# Altium PCB 340-XXXXX-XXX.PcbDoc (part 1 of 2)
Units mil, origin at the board's own origin, x right, y up, seen from the top; angles counter-clockwise.
Board outline 2825 x 4480 mil, 2 copper layers (Top Layer, Bottom Layer), stack 60.8 mil thick; 87 components, 73 nets, 342 pads, 470 vias.
Unrouted connection lines stored in the file: 3.
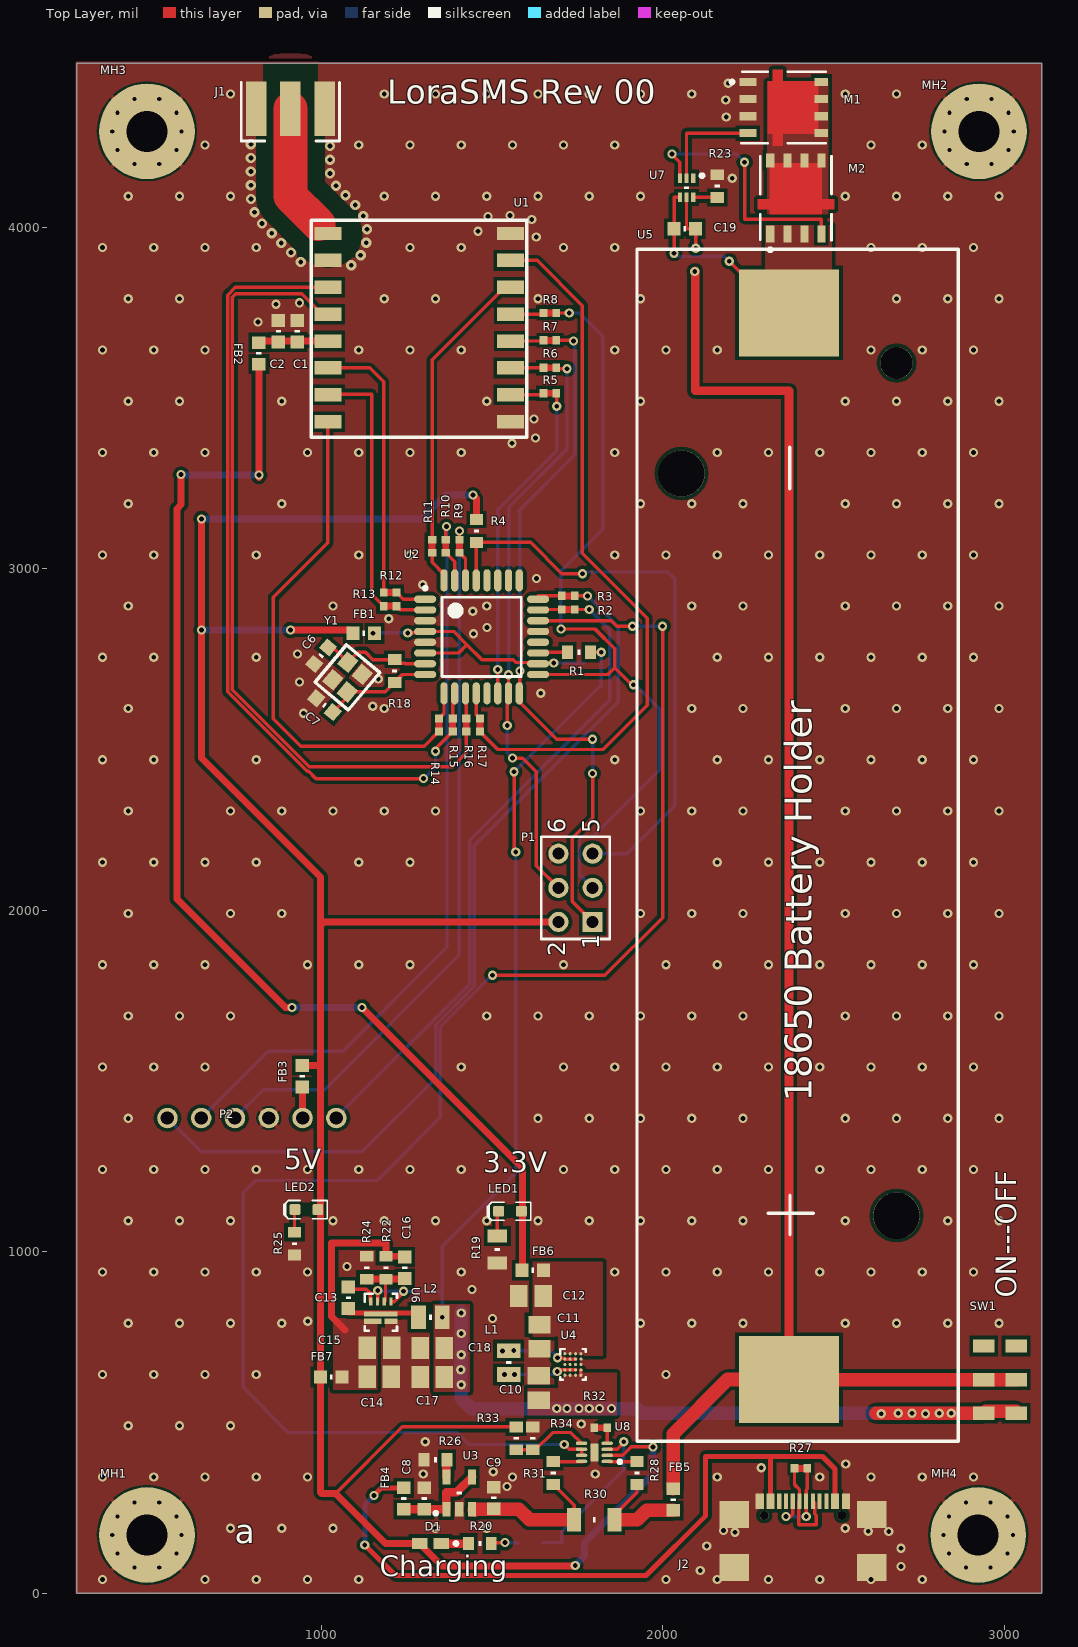
[diagram p0: Top Layer view]
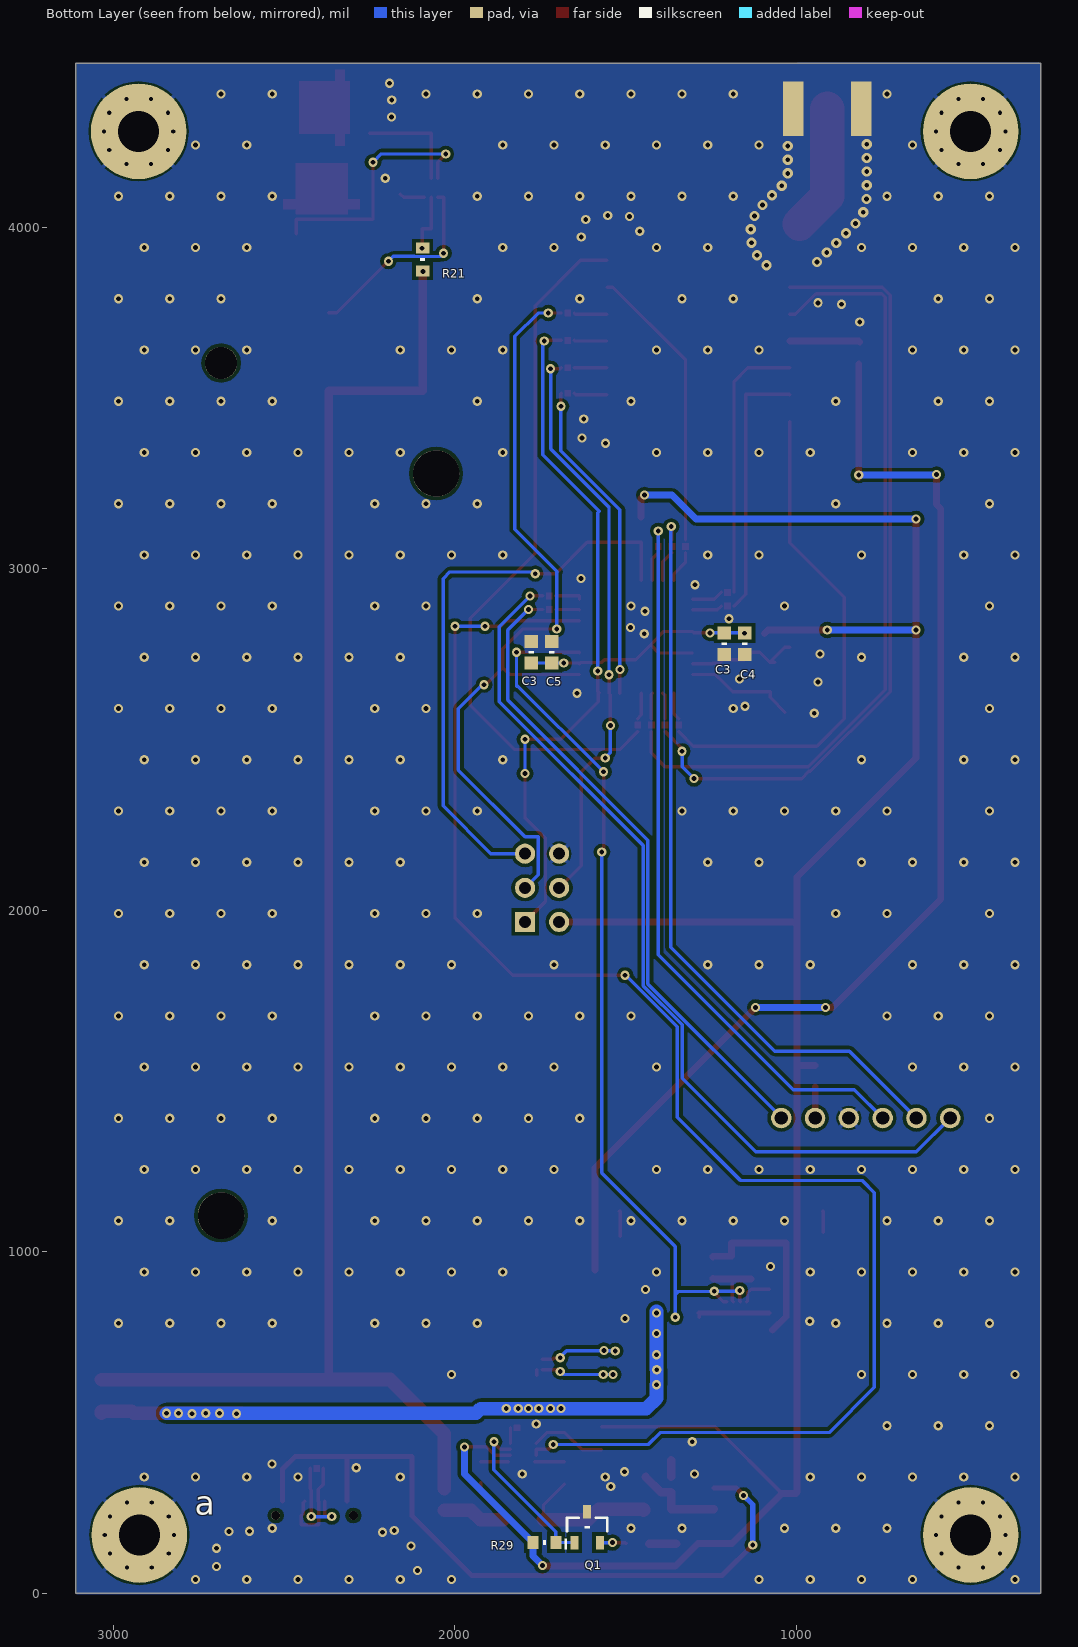
[diagram p1: Bottom Layer view, seen from below]

## Layer stack, top to bottom
Top Solder: solder mask 0.4, Solder Resist, Dk 3.5
Top Layer: signal copper 1.4
Dielectric1: core 58, FR-4, Dk 4.8
Bottom Layer: signal copper 1.4
Bottom Solder: solder mask 0.4, Solder Resist, Dk 3.5

## Board outline
285,0 3110,0 3110,4480 285,4480

## Design rules (kind name [scope] priority, off if disabled: settings)
AcuteAngle [All] p1: minimum=5.50000000000000E+0001 checktracksonly=FALSE
Clearance "50 Ohms" [InNetClass('50 Ohms')] p1: gap=50 ignorepadtopadclearanceinfootprint=FALSE
Clearance LAYER4-GND [InNamedPolygon('LAYER4-GND')] p2: gap=9.84 ignorepadtopadclearanceinfootprint=FALSE except(0: Arc-Hole Track-Hole SMDPad-Hole THPad-Hole Via-Hole Fill-Hole Poly-Hole Region-Hole Text-Hole)
Clearance BOT-GND [InNamedPolygon('BOT-GND')] p3: gap=9.84 ignorepadtopadclearanceinfootprint=FALSE except(0: Arc-Hole Track-Hole SMDPad-Hole THPad-Hole Via-Hole Fill-Hole Poly-Hole Region-Hole Text-Hole)
Clearance LAYER3-GND [InNamedPolygon('LAYER3-GND')] p4: gap=9.84 ignorepadtopadclearanceinfootprint=FALSE except(0: Arc-Hole Track-Hole SMDPad-Hole THPad-Hole Via-Hole Fill-Hole Poly-Hole Region-Hole Text-Hole)
Clearance LAYER1-GND [InNamedPolygon('LAYER1-GND')] p5: gap=9.84 ignorepadtopadclearanceinfootprint=FALSE except(0: Arc-Hole Track-Hole SMDPad-Hole THPad-Hole Via-Hole Fill-Hole Poly-Hole Region-Hole Text-Hole)
Clearance TOP-GND [InNamedPolygon('TOP-GND')] p6: gap=9.84 ignorepadtopadclearanceinfootprint=FALSE except(0: Arc-Hole Track-Hole SMDPad-Hole THPad-Hole Via-Hole Fill-Hole Poly-Hole Region-Hole Text-Hole)
Clearance LAYER2-GND [InNamedPolygon('LAYER2-GND')] p7: gap=9.84 ignorepadtopadclearanceinfootprint=FALSE except(0: Arc-Hole Track-Hole SMDPad-Hole THPad-Hole Via-Hole Fill-Hole Poly-Hole Region-Hole Text-Hole)
Clearance Clearance_DIFF [(InDifferentialPairClass('All Differential Pairs')) vs (InDifferentialPairClass('All Differential Pairs'))] p8: gap=3.94 ignorepadtopadclearanceinfootprint=FALSE except(0: Arc-Hole Track-Hole SMDPad-Hole THPad-Hole Via-Hole Fill-Hole Poly-Hole Region-Hole Text-Hole; 4.25: Arc-Via Track-Via; 4.96: SMDPad-Via; 5: Via-Via Via-Fill Via-Poly Via-Region Via-Text; 6.89: THPad-Via)
Clearance [All] p9: gap=10 ignorepadtopadclearanceinfootprint=FALSE except(0: Arc-Hole Track-Hole SMDPad-Hole THPad-Hole Via-Hole Fill-Hole Poly-Hole Region-Hole Text-Hole; 3.94: Arc-Arc Arc-Track Arc-SMDPad Arc-THPad Arc-Via Arc-Text Track-Track Track-SMDPad Track-THPad Track-Via Track-Text SMDPad-SMDPad SMDPad-THPad SMDPad-Via SMDPad-Text THPad-THPad THPad-Text Fill-Text Poly-Text Region-Text Text-Text; 5: Via-Via Via-Text; 6.89: THPad-Via)
ComponentClearance [All] p1 off: gap=10 collisioncheckmode=3 verticalgap=10 showdistances=FALSE
ComponentClearance ComponentClearance_Place [All] p2 off: gap=0 collisioncheckmode=3 verticalgap=10 showdistances=FALSE
ComponentClearance ComponentClearance_JTAG [HasFootprint('TP-600') vs HasFootprint('TP-600')] p3 off: gap=600.39 collisioncheckmode=3 verticalgap=9.84 showdistances=FALSE
ComponentClearance ComponentClearance_TP [InComponent('TP57') Or InComponent('TP60') vs InComponent('TP58') or InComponent('tp61')] p4 off: gap=0 collisioncheckmode=3 verticalgap=9.84 showdistances=FALSE
ComponentClearance ComponentClearance_SHORT [HasFootprint('SHORT-CIRCUIT') vs HasFootprint('SHORT-CIRCUIT')] p5 off: gap=0 collisioncheckmode=3 verticalgap=9.84 showdistances=FALSE
ComponentClearance ComponentClearance_TIEBAR [HasFootprint('TIEBAR-3N') vs HasFootprint('TIEBAR-3N')] p6 off: gap=0 collisioncheckmode=3 verticalgap=9.84 showdistances=FALSE
DiffPairsRouting Diff_90Ohm_USB [InDifferentialPairClass('Diff_USB')] p1: maxlimit=5.5 minlimit=5.5 mostfreqgap=5.5 toplayer_minwidth=9 toplayer_maxwidth=9 toplayer_prefwidth=9 bottomlayer_minwidth=9 bottomlayer_maxwidth=9 bottomlayer_prefwidth=9 maxuncoupledlength=150
DiffPairsRouting Diff_90Ohm_RF [InDifferentialPairClass('Diff_RF')] p2: maxlimit=5.5 minlimit=5.5 mostfreqgap=5.5 toplayer_minwidth=9 toplayer_maxwidth=9 toplayer_prefwidth=9 bottomlayer_minwidth=9 bottomlayer_maxwidth=9 bottomlayer_prefwidth=9 maxuncoupledlength=255
DiffPairsRouting Diff_100Ohm [InDifferentialPairClass('Diff_Ethernet')] p3: maxlimit=7 minlimit=7 mostfreqgap=7 toplayer_minwidth=8 toplayer_maxwidth=8 toplayer_prefwidth=8 bottomlayer_minwidth=8 bottomlayer_maxwidth=8 bottomlayer_prefwidth=8 maxuncoupledlength=400
DiffPairsRouting [(InDifferentialPairClass('All Differential Pairs'))] p4: maxlimit=74.8 minlimit=3.94 mostfreqgap=9.84 toplayer_minwidth=3.94 toplayer_maxwidth=15 toplayer_prefwidth=15 bottomlayer_minwidth=3.94 bottomlayer_maxwidth=15 bottomlayer_prefwidth=15 maxuncoupledlength=400
Height [All] p1 off: minheight=0 maxheight=984.25 prefheight=492.13
HoleSize [All] p1: absolutevalues=TRUE maxlimit=492.13 minlimit=7.87 maxpercent=80.000 minpercent=20.000
HoleToHoleClearance HoleToHoleClearance_TIEBAR [HasFootprint('TIEBAR-3N') vs HasFootprint('TIEBAR-3N')] p1: gap=0 allowstackedmicrovias=TRUE
HoleToHoleClearance [All] p2: gap=9.84 allowstackedmicrovias=TRUE
MatchedLengths MatchedLengths_DDS-DATA [InNetClass('DSS_DATA')] p1: tolerance=250 checknetsindiffpair=TRUE checkdiffpairvsdiffpair=FALSE checkxsignals=FALSE checkothers=FALSE
MatchedLengths MatchedLengths_FPGA_D [InNetClass('FPGA_D[15..0]')] p2: tolerance=1500 checknetsindiffpair=TRUE checkdiffpairvsdiffpair=FALSE checkxsignals=FALSE checkothers=FALSE
MatchedLengths MatchedLengths_FPGA_A [InNetClass('FPGA_A[10..1]')] p3: tolerance=1500 checknetsindiffpair=TRUE checkdiffpairvsdiffpair=FALSE checkxsignals=FALSE checkothers=FALSE
MatchedLengths MatchedLengths_SDRC_A1/2 [(InNetClass('SDRC_A1') OR InNetClass('SDRC_A2'))] p4: tolerance=25 checknetsindiffpair=TRUE checkdiffpairvsdiffpair=FALSE checkxsignals=FALSE checkothers=FALSE
MatchedLengths MatchedLengths_SDRC_A2 [InNetClass('SDRC_A2')] p5: tolerance=25 checknetsindiffpair=TRUE checkdiffpairvsdiffpair=FALSE checkxsignals=FALSE checkothers=FALSE
MatchedLengths MatchedLengths_SDRC_A1 [InNetClass('SDRC_A1')] p6: tolerance=25 checknetsindiffpair=TRUE checkdiffpairvsdiffpair=FALSE checkxsignals=FALSE checkothers=FALSE
MatchedLengths MatchedLengths_SDRC_D [InNetClass('SDRC_D')] p7: tolerance=25 checknetsindiffpair=TRUE checkdiffpairvsdiffpair=FALSE checkxsignals=FALSE checkothers=FALSE
MatchedLengths MatchedLengths_SDRC_A [InNetClass('SDRC_A')] p8: tolerance=25 checknetsindiffpair=TRUE checkdiffpairvsdiffpair=FALSE checkxsignals=FALSE checkothers=FALSE
MinimumAnnularRing MinimumAnnularRing_203 [(AsMM(HoleDiameter) = 0.203)] p1: minimumring=4.92
MinimumAnnularRing MinimumAnnularRing_381 [((ObjectKind = 'Via') And (AsMM(HoleDiameter) = 0.381))] p2: minimumring=4.92
MinimumAnnularRing [All] p3: minimumring=6
MinimumSolderMaskSliver "USB-C SM Clearence" [InComponent('J2')] p1: minsoldermaskwidth=3.94
MinimumSolderMaskSliver [All] p2: minsoldermaskwidth=4.53
PlaneClearance [All] p1: clearance=10
PlaneConnect [All] p1: planeconnectstyle=Relief reliefexpansion=5 reliefentries=4 reliefconductorwidth=12 reliefairgap=6
PolygonConnect [All] p1: thpad.connectstyle=Relief thpad.reliefconductorwidth=12 thpad.reliefentries=4 thpad.polygonreliefangle="45 Angle" thpad.airgapwidth=6 smdpad.connectstyle=Direct smdpad.reliefconductorwidth=12 smdpad.reliefentries=4 smdpad.polygonreliefangle="90 Angle" smdpad.airgapwidth=6 via.connectstyle=Direct via.reliefconductorwidth=6 via.reliefentries=4 via.polygonreliefangle="45 Angle" via.airgapwidth=4
RoutingCorners [All] p1: cornerstyle=45-Degree minsetback=50 maxsetback=100
RoutingPriority [(InDifferentialPairClass('All Differential Pairs'))] p1: routingpriority=1
RoutingTopology RoutingTopology_BOT [OnLayer('Bottom Layer')] p1: topology=Shortest
RoutingTopology RoutingTopology_LR4 [OnLayer('MidLayer4')] p2: topology=Vertical
RoutingTopology RoutingTopology_LR3 [OnLayer('MidLayer3')] p3: topology=Horizontal
RoutingTopology RoutingTopology_LR2 [OnLayer('MidLayer2')] p4: topology=Vertical
RoutingTopology RoutingTopology_LR1 [OnLayer('MidLayer1')] p5: topology=Horizontal
RoutingTopology RoutingTopology_TOP [OnLayer('Top Layer')] p6: topology=Shortest
RoutingTopology [All] p7: topology=Shortest
RoutingVias [All] p1: holewidth=8 width=18 viastyle="Through Hole" minholewidth=8 minwidth=18 maxholewidth=125 maxwidth=340
ShortCircuit ShortCircuit_SHORTS [(InNet('GND') OR InNet('SGND1') OR InNet('SGND2') OR InNet('SGND3') OR InNet('SGND4')and InPADClass(SHORTS)) vs (InNet('GND') OR InNet('SGND1') OR InNet('SGND2') OR InNet('SGND3') OR InNet('SGND4')AND InPADClass(SHORTS))] p1: allowed=TRUE
ShortCircuit ShortCircuit_TIEBAR-PP [InPadClass('TIE BAR') vs InPadClass('TIE BAR')] p2: allowed=TRUE
ShortCircuit ShortCircuit_TIEBAR-TP [InNetClass('SDRC_A1')OR InNetClass('SDRC_A2')OR InNetClass('SDRC_A') vs InPadClass('TIE BAR')] p3: allowed=TRUE
ShortCircuit ShortCircuit_A14 [(InNet('SDRC_A14') OR InNet('SDRC_A14-1') OR InNet('SDRC_A14-2')) vs (InNet('SDRC_A14') OR InNet('SDRC_A14-1') OR InNet('SDRC_A14-2'))] p4: allowed=TRUE
ShortCircuit ShortCircuit_A13 [(InNet('SDRC_A13') OR InNet('SDRC_A13-1') OR InNet('SDRC_A13-2')) vs (InNet('SDRC_A13') OR InNet('SDRC_A13-1') OR InNet('SDRC_A13-2'))] p5: allowed=TRUE
ShortCircuit ShortCircuit_A12 [(InNet('SDRC_A12') OR InNet('SDRC_A12-1') OR InNet('SDRC_A12-2')) vs (InNet('SDRC_A12') OR InNet('SDRC_A12-1') OR InNet('SDRC_A12-2'))] p6: allowed=TRUE
ShortCircuit ShortCircuit_A11 [(InNet('SDRC_A11') OR InNet('SDRC_A11-1') OR InNet('SDRC_A11-2')) vs (InNet('SDRC_A11') OR InNet('SDRC_A11-1') OR InNet('SDRC_A11-2'))] p7: allowed=TRUE
ShortCircuit ShortCircuit_A10 [(InNet('SDRC_A10') OR InNet('SDRC_A10-1') OR InNet('SDRC_A10-2')) vs (InNet('SDRC_A10') OR InNet('SDRC_A10-1') OR InNet('SDRC_A10-2'))] p8: allowed=TRUE
ShortCircuit ShortCircuit_A9 [(InNet('SDRC_A9') OR InNet('SDRC_A9-1') OR InNet('SDRC_A9-2')) vs (InNet('SDRC_A9') OR InNet('SDRC_A9-1') OR InNet('SDRC_A9-2'))] p9: allowed=TRUE
ShortCircuit ShortCircuit_A8 [(InNet('SDRC_A8') OR InNet('SDRC_A8-1') OR InNet('SDRC_A8-2')) vs (InNet('SDRC_A8') OR InNet('SDRC_A8-1') OR InNet('SDRC_A8-2'))] p10: allowed=TRUE
ShortCircuit ShortCircuit_A7 [(InNet('SDRC_A7') OR InNet('SDRC_A7-1') OR InNet('SDRC_A7-2')) vs (InNet('SDRC_A7') OR InNet('SDRC_A7-1') OR InNet('SDRC_A7-2'))] p11: allowed=TRUE
ShortCircuit ShortCircuit_A6 [(InNet('SDRC_A6') OR InNet('SDRC_A6-1') OR InNet('SDRC_A6-2')) vs (InNet('SDRC_A6') OR InNet('SDRC_A6-1') OR InNet('SDRC_A6-2'))] p12: allowed=TRUE
ShortCircuit ShortCircuit_A5 [(InNet('SDRC_A5') OR InNet('SDRC_A5-1') OR InNet('SDRC_A5-2')) vs (InNet('SDRC_A5') OR InNet('SDRC_A5-1') OR InNet('SDRC_A5-2'))] p13: allowed=TRUE
ShortCircuit ShortCircuit_A4 [(InNet('SDRC_A4') OR InNet('SDRC_A4-1') OR InNet('SDRC_A4-2')) vs (InNet('SDRC_A4') OR InNet('SDRC_A4-1') OR InNet('SDRC_A4-2'))] p14: allowed=TRUE
ShortCircuit ShortCircuit_A3 [(InNet('SDRC_A3') OR InNet('SDRC_A3-1') OR InNet('SDRC_A3-2')) vs (InNet('SDRC_A3') OR InNet('SDRC_A3-1') OR InNet('SDRC_A3-2'))] p15: allowed=TRUE
ShortCircuit ShortCircuit_A2 [(InNet('SDRC_A2') OR InNet('SDRC_A2-1') OR InNet('SDRC_A2-2')) vs (InNet('SDRC_A2') OR InNet('SDRC_A2-1') OR InNet('SDRC_A2-2'))] p16: allowed=TRUE
ShortCircuit ShortCircuit_A1 [(InNet('SDRC_A1') OR InNet('SDRC_A1-1') OR InNet('SDRC_A1-2')) vs (InNet('SDRC_A1') OR InNet('SDRC_A1-1') OR InNet('SDRC_A1-2'))] p17: allowed=TRUE
ShortCircuit ShortCircuit_A0 [(InNet('SDRC_A0') OR InNet('SDRC_A0-1') OR InNet('SDRC_A0-2')) vs (InNet('SDRC_A0') OR InNet('SDRC_A0-1') OR InNet('SDRC_A0-2'))] p18: allowed=TRUE
ShortCircuit ShortCircuit_BA0 [(InNet('SDRC_BA0') OR InNet('SDRC_BA0-1') OR InNet('SDRC_BA0-2')) vs (InNet('SDRC_BA0') OR InNet('SDRC_BA0-1') OR InNet('SDRC_BA0-2'))] p19: allowed=TRUE
ShortCircuit ShortCircuit_BA1 [(InNet('SDRC_BA1') OR InNet('SDRC_BA1-1') OR InNet('SDRC_BA1-2')) vs (InNet('SDRC_BA1') OR InNet('SDRC_BA1-1') OR InNet('SDRC_BA1-2'))] p20: allowed=TRUE
ShortCircuit ShortCircuit_BA2 [(InNet('SDRC_BA2') OR InNet('SDRC_BA2-1') OR InNet('SDRC_BA2-2')) vs (InNet('SDRC_BA2') OR InNet('SDRC_BA2-1') OR InNet('SDRC_BA2-2'))] p21: allowed=TRUE
ShortCircuit ShortCircuit_CLK_P [(InNet('SDRC_CLK_P') OR InNet('SDRC_CLK-1_P') OR InNet('SDRC_CLK-2_P')) vs (InNet('SDRC_CLK_P') OR InNet('SDRC_CLK-1_P') OR InNet('SDRC_CLK-2_P'))] p22: allowed=TRUE
ShortCircuit ShortCircuit_CLK_N [(InNet('SDRC_CLK_N') OR InNet('SDRC_CLK-1_N') OR InNet('SDRC_CLK-2_N')) vs (InNet('SDRC_CLK_N') OR InNet('SDRC_CLK-1_N') OR InNet('SDRC_CLK-2_N'))] p23: allowed=TRUE
ShortCircuit ShortCircuit_CLKE0 [(InNet('SDRC_CKE0') OR InNet('SDRC_CKE0-1') OR InNet('SDRC_CKE0-2')) vs (InNet('SDRC_CKE0') OR InNet('SDRC_CKE0-1') OR InNet('SDRC_CKE0-2'))] p24: allowed=TRUE
ShortCircuit ShortCircuit_NCS0 [(InNet('SDRC_NCS0') OR InNet('SDRC_NCS0-1') OR InNet('SDRC_NCS0-2')) vs (InNet('SDRC_NCS0') OR InNet('SDRC_NCS0-1') OR InNet('SDRC_NCS0-2'))] p25: allowed=TRUE
ShortCircuit ShortCircuit_NRAS [(InNet('SDRC_NRAS') OR InNet('SDRC_NRAS-1') OR InNet('SDRC_NRAS-2')) vs (InNet('SDRC_NRAS') OR InNet('SDRC_NRAS-1') OR InNet('SDRC_NRAS-2'))] p26: allowed=TRUE
ShortCircuit ShortCircuit_NCAS [(InNet('SDRC_NCAS') OR InNet('SDRC_NCAS-1') OR InNet('SDRC_NCAS-2')) vs (InNet('SDRC_NCAS') OR InNet('SDRC_NCAS-1') OR InNet('SDRC_NCAS-2'))] p27: allowed=TRUE
ShortCircuit ShortCircuit_NWE [(InNet('SDRC_NWE') OR InNet('SDRC_NWE-1') OR InNet('SDRC_NWE-2')) vs (InNet('SDRC_NWE') OR InNet('SDRC_NWE-1') OR InNet('SDRC_NWE-2'))] p28: allowed=TRUE
ShortCircuit [All] p29: allowed=FALSE
SilkToSilkClearance [All] p1: silktosilkclearance=0
SilkToSolderMaskClearance SilkscreenOverComponentPads [IsPad] p1: minsilkscreentomaskgap=1.5 clearancetoexposedcopper=FALSE
SolderMaskExpansion SolderMaskExpansion_VIA [IsVia] p1: expansion=-1.97
SolderMaskExpansion [IsPad] p2: expansion=1.57
SolderMaskExpansion SolderMaskExpansion_1 [All] p3: expansion=1.57
ViasUnderSMD [All] p1 off: allowed=FALSE
Width [All] p1: maxlimit=120 minlimit=3.94 preferedwidth=8 minimp=50.000000 maximp=50.000000 favimp=50.000000
16 further rules are at their usual default settings.

## Classes and differential pairs
net class "50 Ohms": NetJ1_1

## Components (designator, comment, footprint, x,y, rotation, side; value= is the part's Value field where it differs from the comment)
C1 "0.1µF" CAPC1608X95N 930,3695 r90 top
C2 "1.0µF" CAPC1608X95N 875,3695 r90 top
C3 "1.0µF" CAPC1608X95N 1777,2755 r90 bottom
C3 "0.1µF" CAPC1608X95N 1211,2780 r270 bottom
C4 "0.1µF" CAPC1608X95N 1151,2780 r270 bottom
C5 "0.1µF" CAPC1608X95N 1717,2755 r90 bottom
C6 "27pF" CAPC1608X95N 1000,2745 r50 top
C7 "27pF" CAPC1608X95N 1010,2600 r320 top
C8 "1.0µF" CAPC1608X95N 1301.77,276.61 r90 top
C9 "1.0µF" CAPC1608X95N 1506.02,278.62 r90 top
C10 "10µF" CAPC2013X140N 1637,600.57 r90 top
C11 "10µF" CAPC2013X140N 1639,750.43 r270 top
C12 "47µF" CAPC2013X140N 1614.57,870 r180 top
C13 "10nF" CAPC1608X95N 1080,865 r270 top
C14 "22µF" CAPC2013X140N 1170.47,633.15 r0 top
C15 "22µF" CAPC2013X140N 1170.91,718.15 r0 top
C16 "10pF" CAPC1608X95N 1245,952.68 r270 top
C17 "10µF" CAPC2013X140N 1325,632.68 r180 top
C18 "10µF" CAPC2013X140N 1325,717.68 r180 top
C19 "0.1µF" CAPC1608X95N 2065,3995 r180 top
D1 "APT1608SRCPRV" LEDM1608X90N 1320,145 r180 top
FB1 "BLM18PG121SN1D" INDC1608X95N 1125,2810 r0 top
FB2 "BLM18PG121SN1D" INDC1608X95N 817.72,3630 r270 top
FB3 "BLM18PG121SN1D" INDC1608X95N 945,1513 r270 top
FB4 "BLM18PG121SN1D" INDC1608X95N 1241.77,276.61 r90 top
FB5 "BLM18PG121SN1D" INDC1608X95N 2031.02,273.62 r90 top
FB6 "BLM18PG121SN1D" INDC1608X95N 1620,945 r180 top
FB7 "BLM18PG121SN1D" INDC1608X95N 1030,632.68 r180 top
J1 "CONSMA003.062" LINX_CONSMA003.062 910,4435 r0 top
J2 "USB-C USB 2.0" GCT_USB4110-GF-A 2284.45,269.32 r0 top
L1 "1uH" INDC2016X10N 1549,675 r90 top
L2 "1uH" INDC2016X10N 1320,807.68 r180 top
LED1 "Green" LED-0603-GREEN 1553,1118 r180 top
LED2 "Green" LED-0603-GREEN 957,1123 r180 top
M1 "BSS138" VISHAY_POWERPAK-SO-8-SINGLE 2355,4350 r0 top
M2 "BSS138" VISHAY_POWERPAK-SO-8-SINGLE 2390,4085 r90 top
MH1 "MOUNTING HOLE" MHOLE-120-280 490,170 r0 top
MH2 "MOUNTING HOLE" MHOLE-120-280 2926.56,4280 r0 top
MH3 "MOUNTING HOLE" MHOLE-120-280 490,4280 r0 top
MH4 "MOUNTING HOLE" MHOLE-120-280 2924.06,170 r0 top
P1 "Header 3X2" HDR2X3 1795,1965 r90 top
P2 "BT_Header" BT_MODULE 1044.49,1391 r180 top
Q1 "MMBT3906" SOT95P240X115-3N 1613,193 r90 bottom
R1 "100K" RESC1608X84N 1755.28,2755 r180 top
R2 "0" RESC1005X40N_SHORT 1723.9,2880 r180 top net-tie
R3 "0" RESC1005X40N_SHORT 1723.9,2920 r180 top net-tie
R4 "10K" RESC1608X84N 1455,3110 r270 top
R5 "0" RESC1005X40N_SHORT 1670,3513.19 r180 top net-tie
R6 "0" RESC1005X40N_SHORT 1670,3588.19 r180 top net-tie
R7 "0" RESC1005X40N_SHORT 1670,3668.19 r180 top net-tie
R8 "0" RESC1005X40N_SHORT 1670,3748.19 r180 top net-tie
R9 "0" RESC1005X40N_SHORT 1405,3065 r270 top net-tie
R10 "0" RESC1005X40N_SHORT 1365,3065 r270 top net-tie
R11 "0" RESC1005X40N_SHORT 1325,3065 r270 top net-tie
R12 "0" RESC1005X40N_SHORT 1201.81,2930 r0 top net-tie
R13 "0" RESC1005X40N_SHORT 1201.81,2890 r0 top net-tie
R14 "0" RESC1005X40N_SHORT 1345,2541.81 r90 top net-tie
R15 "0" RESC1005X40N_SHORT 1385,2541.81 r90 top net-tie
R16 "0" RESC1005X40N_SHORT 1425,2541.81 r90 top net-tie
R17 "0" RESC1005X40N_SHORT 1465,2541.81 r90 top net-tie
R18 "1.0MEG" RESC1608X84N 1215,2700 r270 top
R19 "330" RESC2013X84N 1516,1006 r270 top
R20 "510" RESC1608X84N 1465,145 r0 top
R21 "330" RESC1608X84N 2095,3905 r90 bottom
R22 "316K" RESC1608X84N 1190,952.68 r270 top
R23 "2.2K" RESC1608X84N 2160,4120 r90 top
R24 "100K" RESC1608X84N 1133.19,952.68 r90 top
R25 "510" RESC1608X84N 922,1023 r270 top
R26 "2.00K" RESC1608X84N 1335,390 r180 top
R27 "0" RESC1005X40N_SHORT 2405,365 r180 top net-tie
R28 "5.1" RESC1608X84N 1925,351.54 r90 top
R29 "10K" RESC1608X84N 1738,148 r180 bottom
R30 "50m" RESC3216X84N 1800,215 r180 top
R31 "5.1" RESC1608X84N 1680,351.54 r90 top
R32 "0" RESC1005X40N_SHORT 1818.5,484 r0 top net-tie
R33 "100K" RESC1608X84N 1571,453 r270 top
R34 "4.02K" RESC1608X84N 1620,453 r90 top
SW1 "SWITCH" JS202011JAQN 2940.51,526.57 r90 top
U1 "RFM69" RFM69HCW 1555,3430 r180 top
U2 "ATmega328P-AUR" 32A_N 1470,2800 r0 top
U3 "MCP73812" SOT95P280X145-5N 1404.37,292.87 r90 top
U4 "TPS630242YFFR" YFF0020AEBA 1737.13,669.25 r0 top value=N/A
U5 "18650" 18650 2370.04,625.08 r90 top
U6 "N/A" RNS0007A 1175,817.68 r0 top
U7 "BQ29702DSER" SOTFL50P162X60-6N 2070,4115 r270 top
U8 "INA381" SON45P200X200X80-9N 1800,412 r180 top
Y1 "16 MHz" Crystal_2.5x2.0 1077.78,2725.43 r230 top

## Footprints (in the part's own frame and the unit in brackets; to place one, negate y for a bottom-side part, rotate by r counter-clockwise, add the part's x,y. Pads: shape width x height; smd on the part's side, far side on the other; paste and mask are expansions set on the pad)
32A_N [mm] "Thin QFP, 32-Leads, Body 7x7mm, Pitch 0.8mm, IPC Medium Density"
  oval 1.65x0.55 smd: 1(-4.2,2.8) 2(-4.2,2) 3(-4.2,1.2) 4(-4.2,0.4) 5(-4.2,-0.4) 6(-4.2,-1.2) 7(-4.2,-2) 8(-4.2,-2.8) 17(4.2,-2.8) 18(4.2,-2) 19(4.2,-1.2) 20(4.2,-0.4) 21(4.2,0.4) 22(4.2,1.2) 23(4.2,2) 24(4.2,2.8)
  oval 0.55x1.65 smd: 9(-2.8,-4.2) 10(-2,-4.2) 11(-1.2,-4.2) 12(-0.4,-4.2) 13(0.4,-4.2) 14(1.2,-4.2) 15(2,-4.2) 16(2.8,-4.2) 25(2.8,4.2) 26(2,4.2) 27(1.2,4.2) 28(0.4,4.2) 29(-0.4,4.2) 30(-1.2,4.2) 31(-2,4.2) 32(-2.8,4.2)
  silkscreen extent -4.32,-2.95 2.95,3.75, body extent -3.5,-3.5 3.5,3.5, height 1.2
18650 [mm] "HOLDER BATTERY 1CELL 18650 SMD"
  round 3.45 hole 3.45: 0(12.19,-8) 0(67.39,8)
  round 2.39 hole 2.39: 0(75.61,-8)
  rect 6.47x7.46 smd: 1(0,0) 2(79.34,0)
  silkscreen extent -4.6,-12.6 84.07,11.3, body extent -3.15,-10.21 82.85,10.44, height 14.86
BT_MODULE [mil]
  round 60 hole 39.37: 1(0,0) 2(98.82,0) 3(197.64,0) 4(296.85,0) 5(395.67,0) 6(494.49,0)
CAPC1608X95N [mm] "Chip Capacitor, Body 1.6x0.8mm, IPC Medium Density (0603)"
  rect 0.95x1 smd: 1(-0.8,0) 2(0.8,0)
  silkscreen extent -0.1,-0.2 0.1,0.2, body extent -0.8,-0.4 0.8,0.4, height 0.95
CAPC2013X140N [mm] "Chip Capacitor, 2-Leads, Body 2.0x1.3mm, IPC Medium Density"
  rect 1.3x1.65 smd: 1(-0.9,0) 2(0.9,0)
  body extent -1.19,-0.82 1.19,0.82, height 1.4
Crystal_2.5x2.0 [mm]
  rect 1.2x1.1 smd: 1(0,0) 2(1.7,0) 3(1.7,1.4) 4(0,1.4)
  silkscreen extent -0.94,-0.91 2.69,2.31
GCT_USB4110-GF-A [mm]
  round 0.65 hole 0.65 paste+0 mask+0: 0(0.33,-1.075) 0(6.11,-1.075)
  rect 0.6x1.15 smd mask+0: A1(0,0) A4(0.8,0) A9(5.602,0) A12(6.402,0)
  rect 0.3x1.15 smd mask+0: A5(1.952,0) A6(2.952,0) A7(3.452,0) A8(4.452,0) B5(4.952,0) B6(3.952,0) B7(2.452,0) B8(1.45,0)
  rect 2.18x2 smd mask+0.05: H1(-1.89,-1) H2(8.33,-1) H4(8.33,-4.93)
  rect 2.18x2 smd paste+0 mask+0.05: H3(-1.89,-4.93)
  body extent -2.44,-10.19 8.86,0.31, height 3.23
HDR2X3 [mm] "Connector; Header; 3x2 Position"
  rect 1.5x1.5 hole 0.9: 1(0,0)
  round 1.5 hole 0.9: 2(0,2.54) 3(2.54,0) 4(2.54,2.54) 5(5.08,0) 6(5.08,2.54)
  silkscreen extent -1.27,-1.27 6.35,3.81
INDC1608X95N [mm] "Chip Inductor, 2-Leads, Body 1.6x0.8mm, IPC Medium Density"
  rect 0.95x1 smd: 1(-0.8,0) 2(0.8,0)
  silkscreen extent -0.1,-0.2 0.1,0.2, body extent -0.87,-0.47 0.87,0.47, height 0.95
INDC2016X10N [mm] "Chip Inductor, 2-Leads, Body 2.00x1.60mm, IPC Medium Density"
  rect 1.09x1.74 smd: 1(-0.885,0) 2(0.885,0)
  silkscreen extent -0.1,-0.2 0.1,0.2, body extent -1.05,-0.85 1.05,0.85, height 1
JS202011JAQN [mm]
  rect 1x1.6 smd: 1(0,0) 1(0,-2.4) 2(2.5,-2.4) 2(2.5,0) 3(5,-2.4) 3(5,0)
  body extent -2.03,-4.96 6.97,0.59, height 3.62
LED-0603-GREEN [mm]
  round 0.254 on Mech15: 0(0,0)
  rrect25% 0.8x0.8 smd: A(-0.85,0) K(0.85,0)
  Top Layer pour cut-out: -0.5,0.5 0.5,0.5 0.5,-0.5 -0.5,-0.5
  silkscreen extent -1.55,-0.68 1.68,0.68, body extent -0.8,-0.4 0.8,0.4, height 0.75
LEDM1608X90N [mm] "Molded LED, 2-Leads, Body 1.6x0.8mm, IPC Medium Density"
  rect 1.15x0.85 smd: A(0.8,0) C(-0.8,0)
  silkscreen extent -2.03,-0.12 -1.78,0.12, body extent -0.85,-0.45 0.85,0.45, height 0.9
LINX_CONSMA003.062 [mm] "CONN, SMA JACK FEMALE, 50 OHM, EDGE MNT"
  rect 1.52x4.06 smd: 1(0,-2.25) 2(-2.54,-2.25) 2(2.54,-2.25)
  rect 1.52x4.06 smd far side: 2(-2.54,-2.25) 2(2.54,-2.25)
  silkscreen extent -3.65,-4.65 3.65,-0.3, body extent -3.96,-3.9 3.96,7.64, height 4.62
MHOLE-120-280 [mil]
  round 25 hole 12 paste-1968.5 mask+2: 1(-101.56,0) 1(-85.94,-54.69) 1(-85.94,54.69) 1(-35.94,-95.31) 1(-35.94,95.31) 1(35.94,-95.31) 1(35.94,95.31) 1(85.94,-54.69) 1(85.94,54.69) 1(101.56,0)
  round 280 hole 120 paste-1968.5 mask+2: 1(0,0)
RESC1005X40N_SHORT [mm] "Chip Resistor, Body 1.0x0.5mm, IPC Medium Density"
  rect 0.57x0.62 smd: 1(-0.48,0) 2(0.48,0)
  Top Layer region: -0.254,-0.254 0.254,-0.254 0.254,0.254 -0.254,0.254
  body extent -0.55,-0.3 0.55,0.3, height 0.4
RESC1608X84N [mm] "Chip Resistor, Body 1.6x0.8mm, IPC Medium Density"
  rect 0.8x1 smd: 1(-0.85,0) 2(0.85,0)
  silkscreen extent -0.1,-0.2 0.1,0.2, body extent -0.8,-0.4 0.8,0.4, height 0.84
RESC2013X84N [mm] "Chip Resistor, 2-Leads, Body 2.0x1.3mm, IPC Medium Density"
  rect 0.95x1.45 smd: 1(-1,0) 2(1,0)
  silkscreen extent -0.1,-0.2 0.1,0.2, body extent -1.09,-0.7 1.09,0.7, height 0.84
RESC3216X84N [mm] "Chip Resistor, 2-Leads, Body 3.2x1.6mm, IPC Medium Density"
  rect 1.05x1.75 smd: 1(-1.5,0) 2(1.5,0)
  silkscreen extent -0.1,-0.2 0.1,0.2, body extent -1.67,-0.86 1.67,0.86, height 0.84
RFM69HCW [mm]
  rect 2x1 smd: 1(0,0) 2(0,-2) 3(0,-4) 4(0,-6) 5(0,-8) 6(0,-10) 7(0,-12) 8(0,-14) 9(13.6,-14) 10(13.6,-12) 11(13.6,-10) 12(13.6,-8) 13(13.6,-6) 14(13.6,-4) 15(13.6,-2) 16(13.6,0)
  silkscreen extent -1.19,-14.99 14.83,1.14, body extent -1.19,-14.96 14.81,1.14, height 1.8
RNS0007A [mm]
  rect 0.25x0.6 smd: 1(-0.75,0.9) 2(-0.25,0.9) 3(0.25,0.9) 4(0.75,0.9)
  rect 2.5x0.35 smd: 5(0,-0.015)
  rect 1x0.4 smd: 6(0.75,-0.54)
  rect 1.3x0.4 smd: 7(-0.6,-0.54)
  silkscreen extent -1.2,-1.25 1.2,1.5
SON45P200X200X80-9N [mm] "SMALL OUTLINE NO LEAD, 8-Leads, Body 2.1x2.1mm (max), Pitch 0.45mm, IPC Medium Density"
  oval 0.85x0.25 smd: 1(-0.95,0.675) 2(-0.95,0.225) 3(-0.95,-0.225) 4(-0.95,-0.675) 5(0.95,-0.675) 6(0.95,-0.225) 7(0.95,0.225) 8(0.95,0.675)
  rect 0.6x1.35 smd: 9(0,0)
  silkscreen extent -2.02,0.58 -1.78,0.82, body extent -1.1,-1.1 1.1,1.1, height 0.8
SOT95P240X115-3N [mm] "SOT23, 3-Leads, Body 3.0x2.5mm (max), Pitch 0.95mm, IPC Medium Density"
  rect 1x0.6 smd: 1(-1.15,0.95) 2(-1.15,-0.95) 3(1.15,0)
  silkscreen extent -1.65,-1.5 0.7,1.7, body extent -0.7,-1.5 0.7,1.5, height 1.15
SOT95P280X145-5N [mm] "SOT23, 5-Leads, Body 3.0x3.0mm (max), Pitch 0.95mm, IPC Medium Density"
  rect 1.1x0.6 smd: 1(-1.2,0.95) 2(-1.2,0) 3(-1.2,-0.95) 4(1.2,-0.95) 5(1.2,0.95)
  silkscreen extent -1.62,-0.2 0.1,1.87, body extent -0.85,-1.5 0.85,1.5, height 1.45
SOTFL50P162X60-6N [mm] "SC89"
  rect 0.71x0.3 smd mask+0.025: 1(-0.72,0.5) 2(-0.72,0) 3(-0.72,-0.5) 4(0.72,-0.5) 5(0.72,0) 6(0.72,0.5)
  silkscreen extent -1.02,-0.2 0.1,1.28, body extent -0.85,-0.85 0.85,0.85, height 0.6
VISHAY_POWERPAK-SO-8-SINGLE [mm] "MOSFET, N-CHANNEL, POWERPAK SO-8 SINGLE"
  rect 1.27x0.61 smd: 1(-2.675,1.9) 2(-2.675,0.625) 3(-2.675,-0.65) 4(-2.675,-1.9)
  rect 1.02x0.61 smd: D(2.79,-1.9) D(2.79,-0.65) D(2.79,0.625) D(2.79,1.9)
  Top Layer region: -1.219,-1.956 2.591,-1.956 2.591,1.956 -1.219,1.956
  Top Layer region: -0.838,-2.87 -0.076,-2.87 -0.076,-1.956 -0.838,-1.956
  Top Layer region: -0.838,1.93 -0.076,1.93 -0.076,2.845 -0.838,2.845
  silkscreen extent -3.97,-2.65 3.1,2.65, body extent -3.12,-2.65 3.12,2.65, height 1.12
YFF0020AEBA [mm]
  round 0.23 smd: 1(-0.6,0.8) 2(-0.2,0.8) 3(0.2,0.8) 4(0.6,0.8) 5(-0.6,0.4) 6(-0.2,0.4) 7(0.2,0.4) 8(0.6,0.4) 9(-0.6,0) 10(-0.2,0) 11(0.2,0) 12(0.6,0) 13(-0.6,-0.4) 14(-0.2,-0.4) 15(0.2,-0.4) 16(0.6,-0.4) 17(-0.6,-0.8) 18(-0.2,-0.8) 19(0.2,-0.8) 20(0.6,-0.8)
  silkscreen extent -0.95,-1.15 0.95,1.15